# Altium PCB Shield_Due.PcbDoc (part 1 of 2)
Units mil, origin at the board's own origin, x right, y up, seen from the top; angles counter-clockwise.
Board outline 10516 x 7552 mil, 4 copper layers (Top Layer, Layer 1 (GND), Layer 2 (PWR), Bottom Layer), stack 71.556 mil thick; 97 components, 77 nets, 424 pads, 5 vias.
Unrouted connection lines stored in the file: 174.
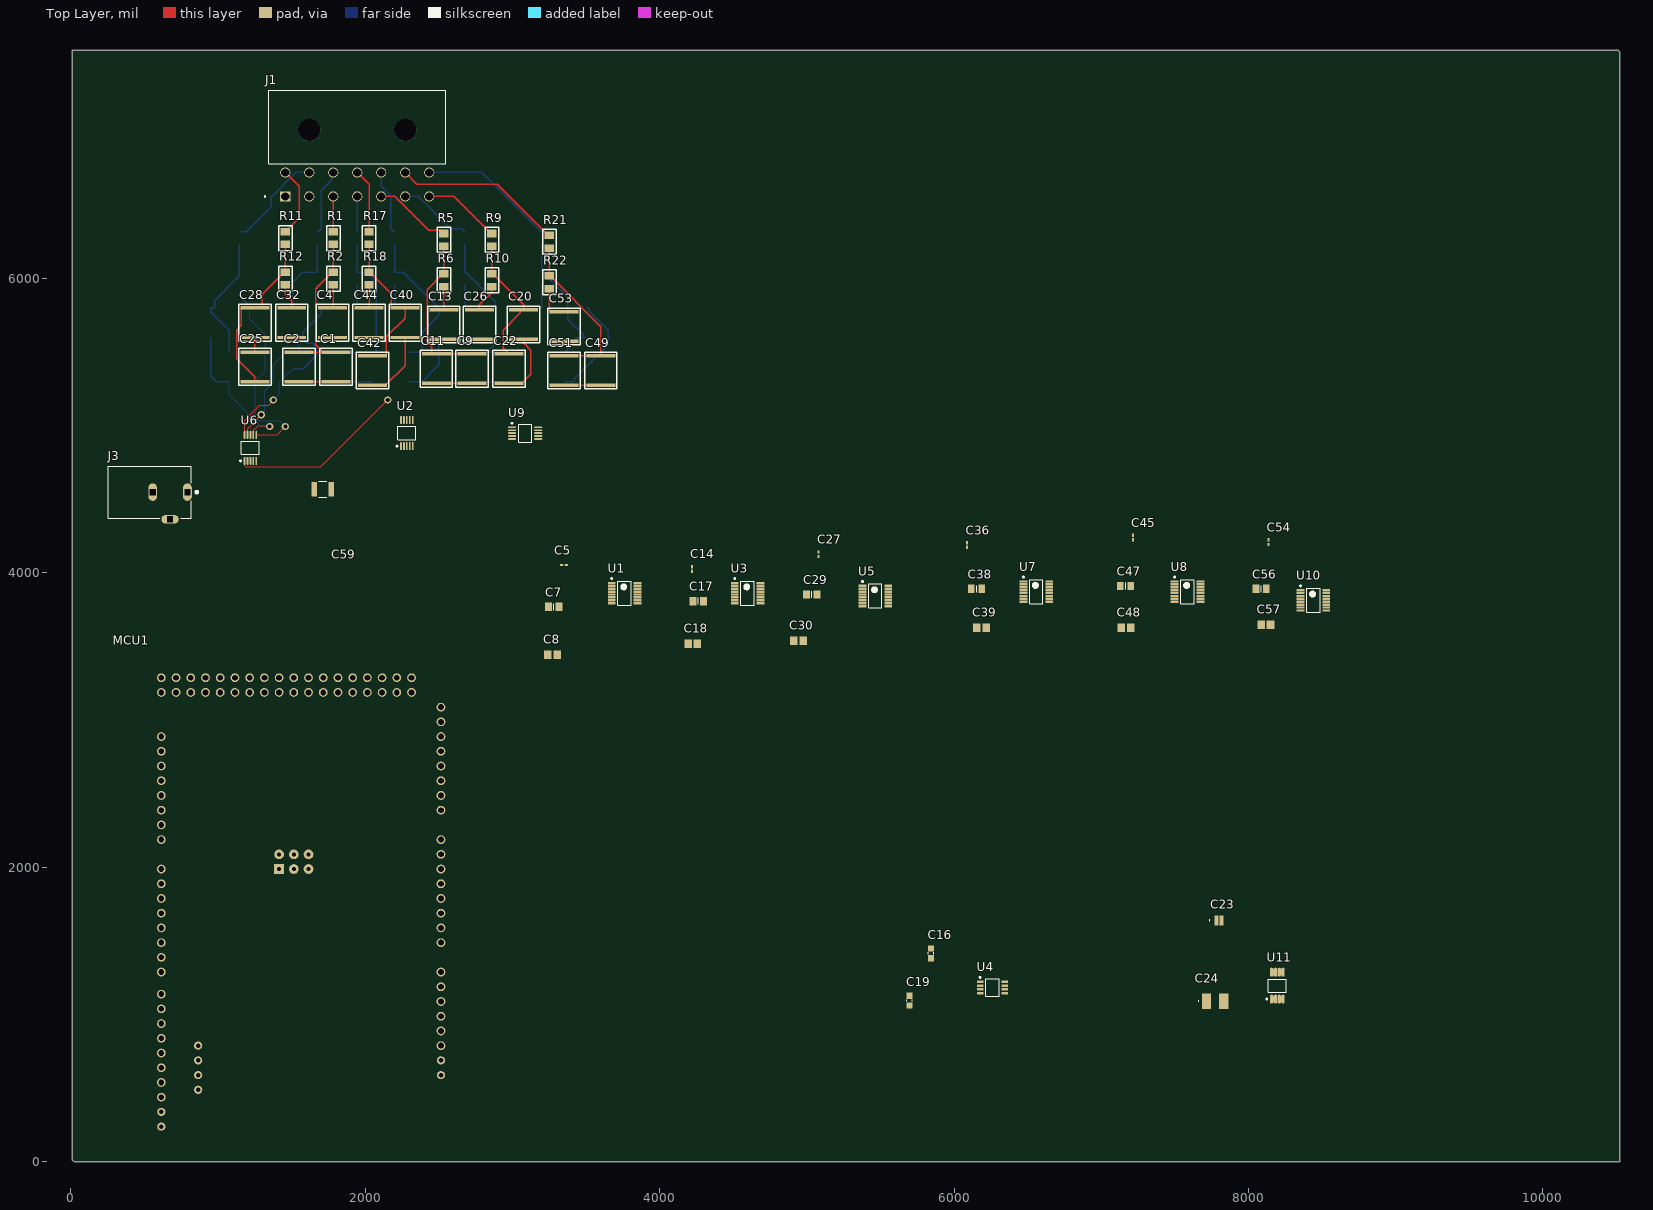
[diagram p0: Top Layer view]
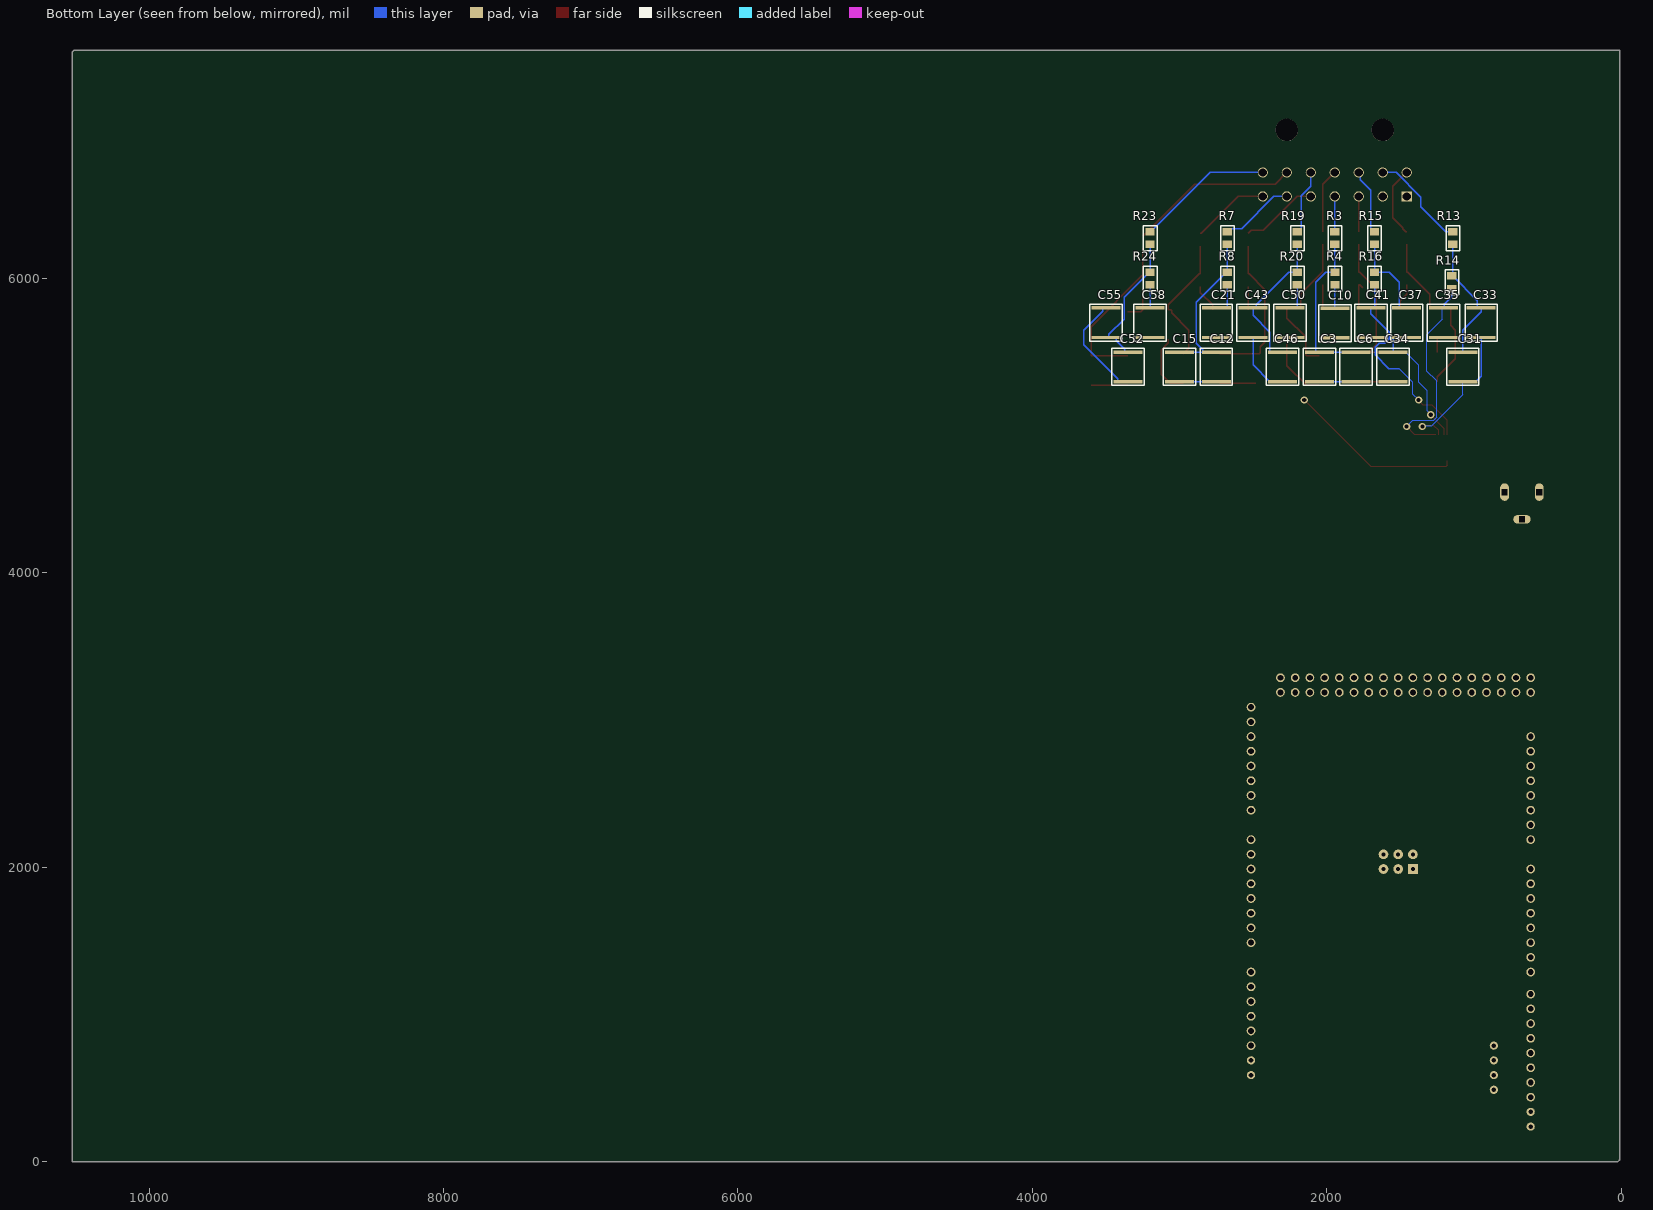
[diagram p1: Bottom Layer view, seen from below]
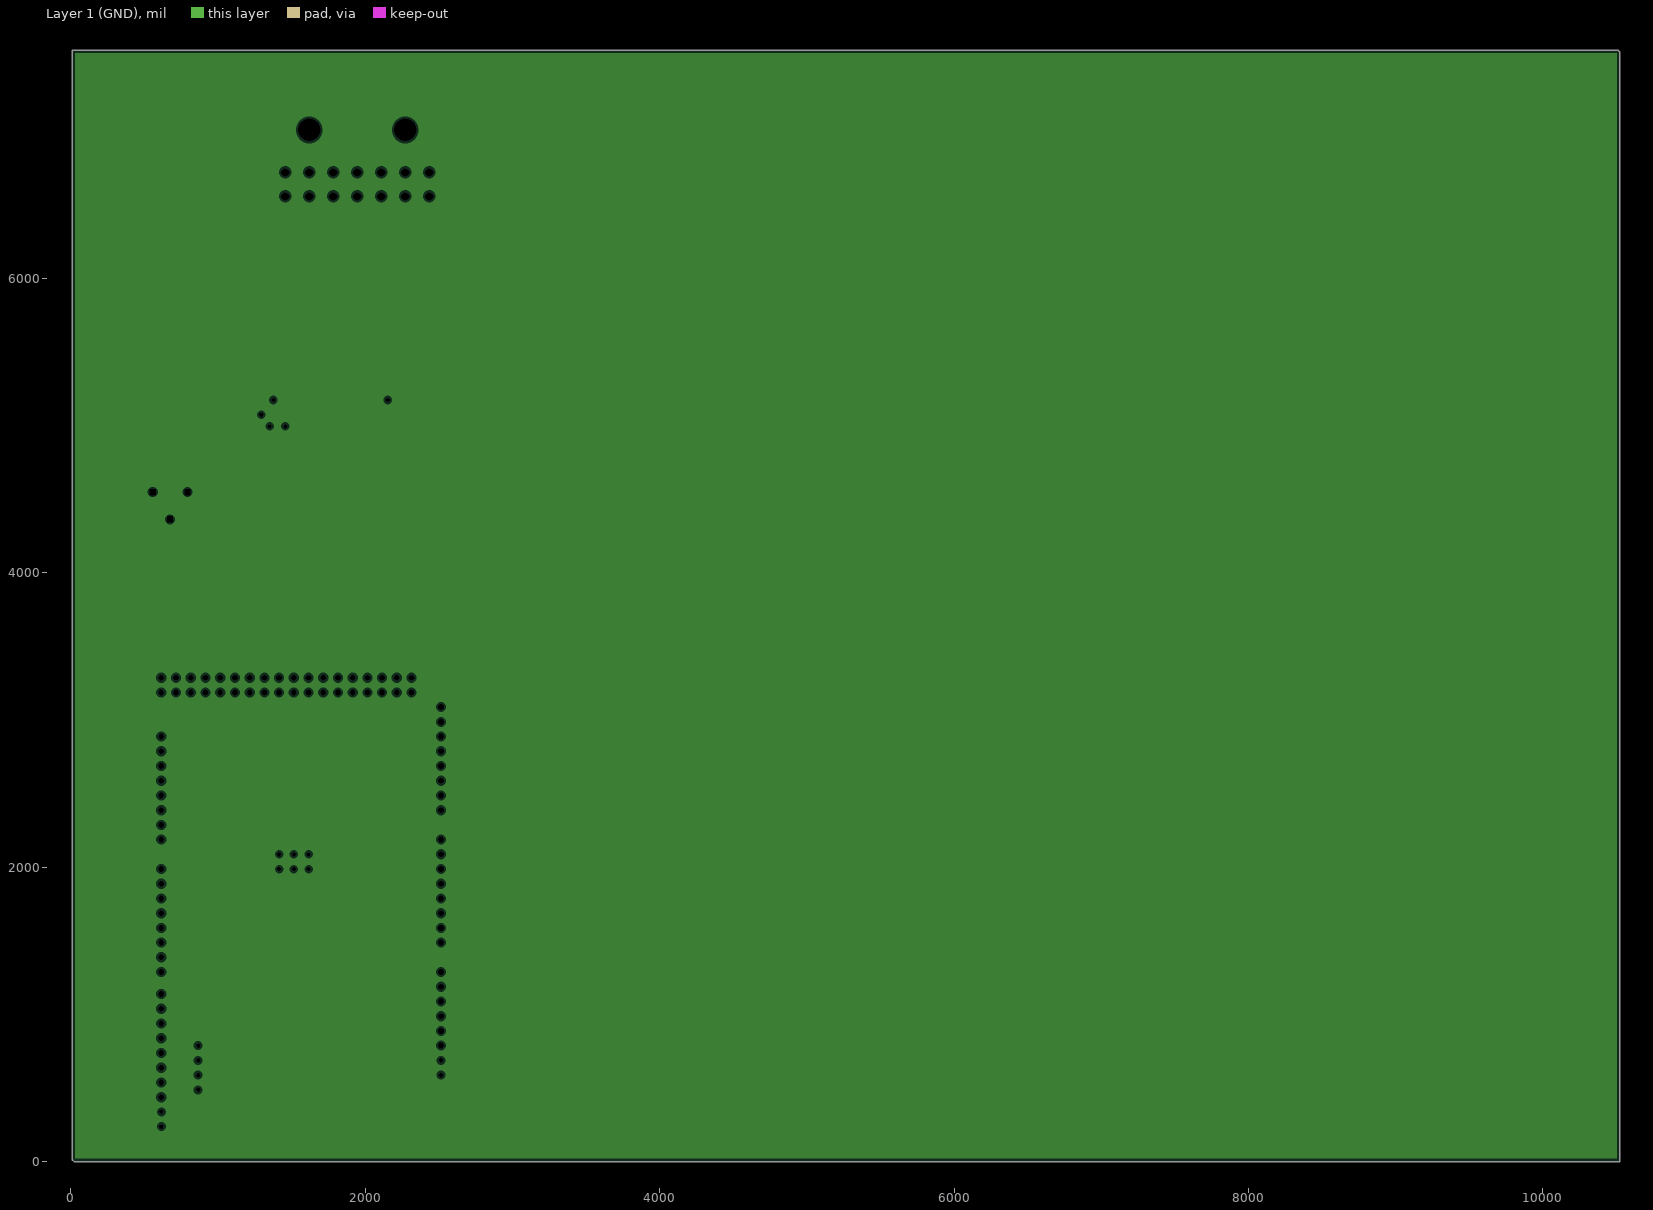
[diagram p2: Layer 1 (GND), clearances drawn from the general rule]
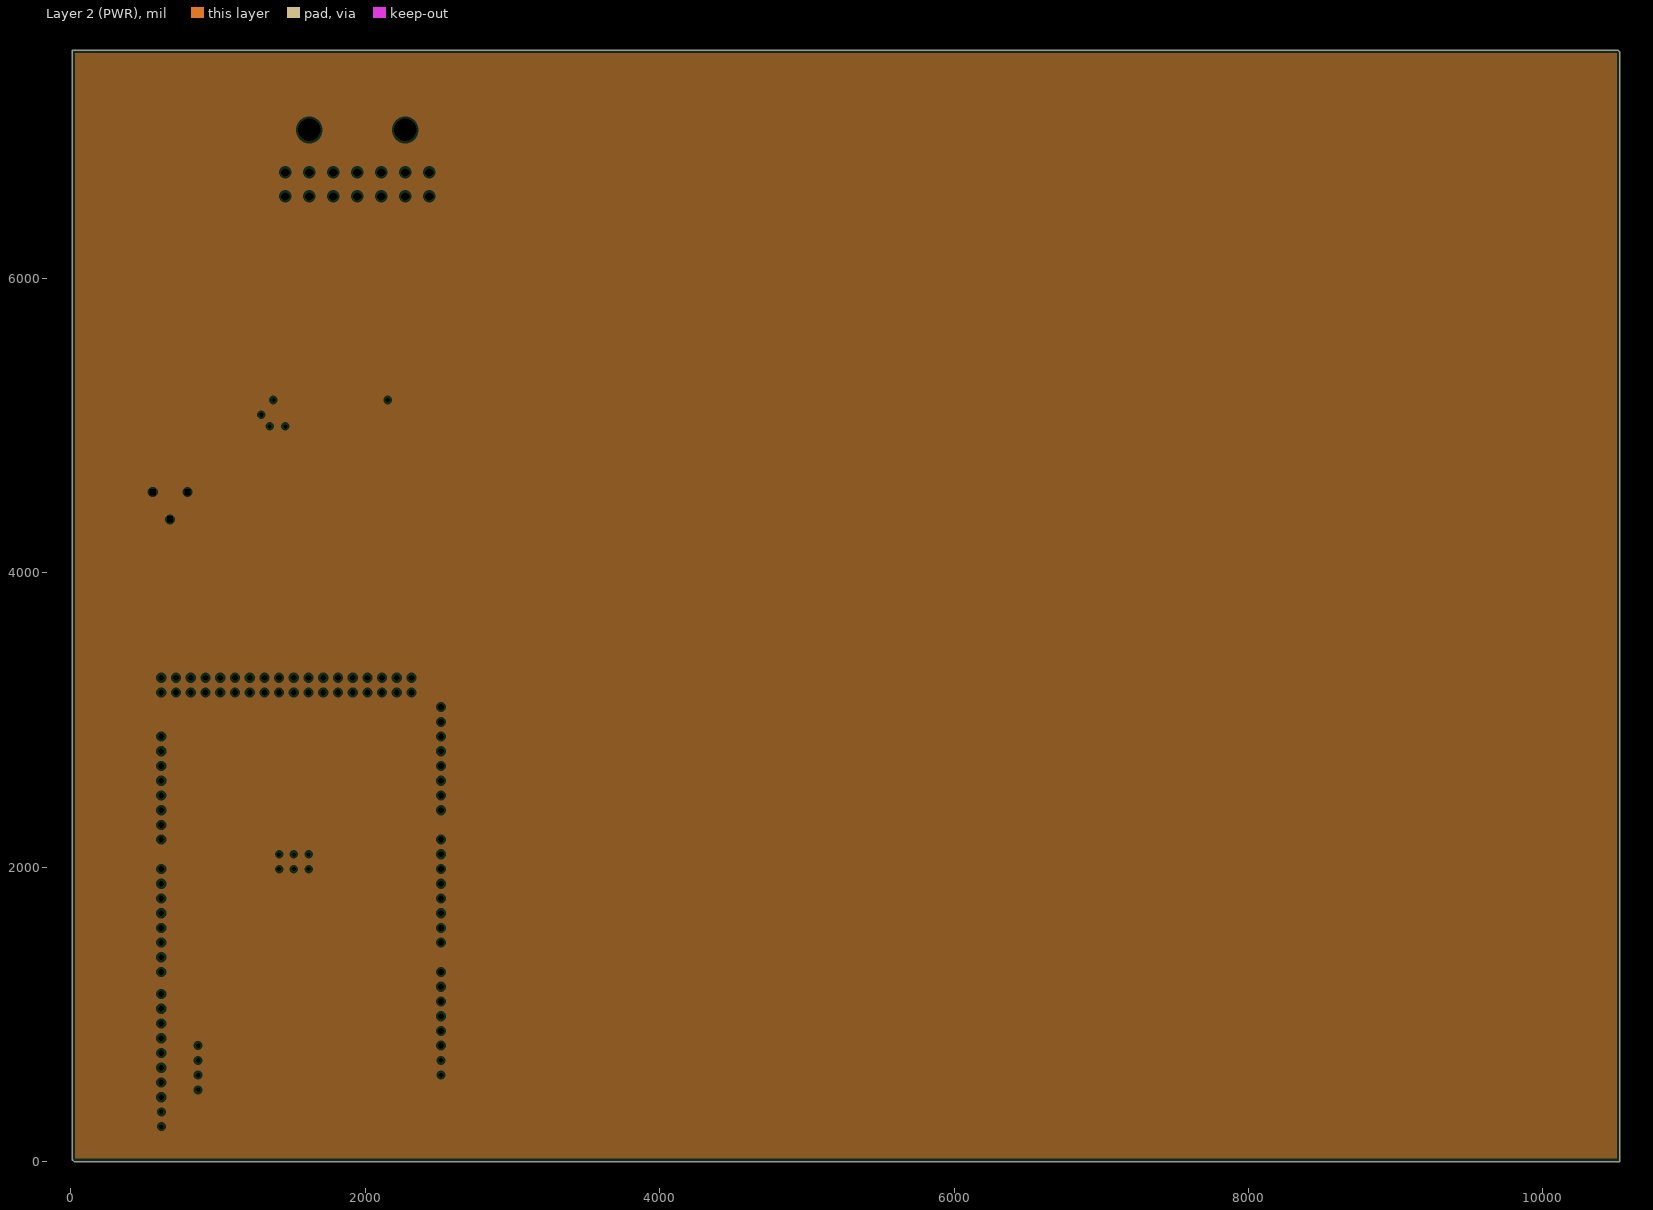
[diagram p3: Layer 2 (PWR), clearances drawn from the general rule]

## Layer stack, top to bottom
Top Solder: solder mask 0.5, Solder Resist, Dk 3.3
Top Layer: signal copper 0.7
Dielectric 1: prepreg 8.7, PP-006, Dk 4.1
Layer 1 (GND): plane copper 1.378
Dielectric1: core 50, FR-4, Dk 4.3
Layer 2 (PWR): plane copper 1.378
Dielectric 2: prepreg 8.7, PP-006, Dk 4.1
Bottom Layer: signal copper 0.7
Bottom Solder: solder mask 0.5, Solder Resist, Dk 3.3

## Board outline
10524,0 10524,7539 10511,7552 8,7552 8,13 21,0 8,13 21,0

## Design rules (kind name [scope] priority, off if disabled: settings)
Clearance [All] p1: gap=10 ignorepadtopadclearanceinfootprint=TRUE
DiffPairsRouting [All] p1: maxlimit=10 minlimit=10 mostfreqgap=10 toplayer_minwidth=10 toplayer_maxwidth=10 toplayer_prefwidth=10 bottomlayer_minwidth=10 bottomlayer_maxwidth=10 bottomlayer_prefwidth=10 maxuncoupledlength=500
HoleSize [All] p1: absolutevalues=TRUE maxlimit=300 minlimit=10 maxpercent=80.000 minpercent=20.000
MinimumAnnularRing [All] p1: minimumring=10
PasteMaskExpansion [All] p1: expansion=10
PlaneClearance [All] p1: clearance=15
PlaneConnect [All] p1: pad.planeconnectstyle=Relief pad.reliefexpansion=20 pad.reliefentries=4 pad.reliefconductorwidth=10 pad.reliefairgap=10 via.planeconnectstyle=Direct via.reliefexpansion=20 via.reliefentries=4 via.reliefconductorwidth=10 via.reliefairgap=10
PolygonConnect [All] p1: thpad.connectstyle=Relief thpad.reliefconductorwidth=10 thpad.reliefentries=4 thpad.polygonreliefangle="90 Angle" thpad.airgapwidth=10 smdpad.connectstyle=Relief smdpad.reliefconductorwidth=10 smdpad.reliefentries=4 smdpad.polygonreliefangle="90 Angle" smdpad.airgapwidth=10 via.connectstyle=Direct via.reliefconductorwidth=10 via.reliefentries=4 via.polygonreliefangle="90 Angle" via.airgapwidth=10
RoutingVias [All] p1: holewidth=10 width=20 viastyle="Through Hole" minholewidth=10 minwidth=20 maxholewidth=10 maxwidth=20
SMDNeckDown [All] p1: percent=100.000
SilkToSolderMaskClearance SilkscreenOverComponentPads [IsPad] p1: minsilkscreentomaskgap=10 clearancetoexposedcopper=TRUE
SolderMaskExpansion [All] p1: expansion=10 istentingtop=FALSE
Width [All] p1: maxlimit=10 minlimit=6 preferedwidth=10 minimp=50.000000 maximp=50.000000 favimp=50.000000
24 further rules are at their usual default settings.

## Components (designator, comment, footprint, x,y, rotation, side; value= is the part's Value field where it differs from the comment)
C1 "CAP CER 0.47UF 50V C0G/NP0 2220" "2220 (5650) Capacitor" 1800,5400 r90 top
C2 "CAP CER 0.47UF 50V C0G/NP0 2220" "2220 (5650) Capacitor" 1550,5400 r90 top
C3 "CAP CER 0.47UF 50V C0G/NP0 2220" "2220 (5650) Capacitor" 2050,5400 r90 bottom
C4 "CAP CER 0.47UF 50V C0G/NP0 2220" "2220 (5650) Capacitor" 1776.09,5700 r270 top
C5 "CL03A225MQ3CRNC" CAP_CL_03_SAM 3349,4055 r0 top
C6 "CAP CER 0.47UF 50V C0G/NP0 2220" "2220 (5650) Capacitor" 1800,5400 r90 bottom
C7 "CL21A476MQCLRNC" CAPC2012X140N 3280.43,3769 r0 top
C8 "C0805C275K8PACTU" CAPC220145_105N_KEM 3271,3444 r0 top
C9 "CAP CER 0.47UF 50V C0G/NP0 2220" "2220 (5650) Capacitor" 2725,5387.99 r270 top
C10 "CAP CER 0.47UF 50V C0G/NP0 2220" "2220 (5650) Capacitor" 1943,5696.69 r270 bottom
C11 "CAP CER 0.47UF 50V C0G/NP0 2220" "2220 (5650) Capacitor" 2481.99,5387.99 r270 top
C12 "CAP CER 0.47UF 50V C0G/NP0 2220" "2220 (5650) Capacitor" 2750,5400 r270 bottom
C13 "CAP CER 0.47UF 50V C0G/NP0 2220" "2220 (5650) Capacitor" 2532.98,5687.99 r270 top
C14 "CL03A225MQ3CRNC" CAP_CL_03_SAM 4220,4026.5 r90 top
C15 "CAP CER 0.47UF 50V C0G/NP0 2220" "2220 (5650) Capacitor" 3000,5400 r270 bottom
C16 "TACL106K010RTA" CAPC1608X90 5843,1415 r90 top
C17 "CL21A476MQCLRNC" CAPC2012X140N 4261.93,3808.37 r0 top
C18 "C0805C275K8PACTU" CAPC220145_105N_KEM 4224.64,3518 r0 top
C19 "TACL106K010RTA" CAPC1608X90 5697,1094.46 r90 top
C20 "CAP CER 0.47UF 50V C0G/NP0 2220" "2220 (5650) Capacitor" 3075,5687.99 r270 top
C21 "CAP CER 0.47UF 50V C0G/NP0 2220" "2220 (5650) Capacitor" 2750,5700 r270 bottom
C22 "CAP CER 0.47UF 50V C0G/NP0 2220" "2220 (5650) Capacitor" 2975,5387.99 r270 top
C23 "AWK107BJ106MV-T" AWK107_0306_TAY 7800.22,1639 r0 top
C24 "25TQC5R6M" POSCAP_B1_B1S_B1G_B15G_B2_B2S 7774,1090 r0 top
C25 "CAP CER 0.47UF 50V C0G/NP0 2220" "2220 (5650) Capacitor" 1250,5400 r90 top
C26 "CAP CER 0.47UF 50V C0G/NP0 2220" "2220 (5650) Capacitor" 2775,5687.99 r270 top
C27 "CL03A225MQ3CRNC" CAP_CL_03_SAM 5080,4127 r90 top
C28 "CAP CER 0.47UF 50V C0G/NP0 2220" "2220 (5650) Capacitor" 1250,5700 r270 top
C29 "CL21A476MQCLRNC" CAPC2012X140N 5033.57,3853.31 r0 top
C30 "C0805C275K8PACTU" CAPC220145_105N_KEM 4943,3539 r0 top
C31 "CAP CER 0.47UF 50V C0G/NP0 2220" "2220 (5650) Capacitor" 1075,5400 r270 bottom
C32 "CAP CER 0.47UF 50V C0G/NP0 2220" "2220 (5650) Capacitor" 1500,5700 r270 top
C33 "CAP CER 0.47UF 50V C0G/NP0 2220" "2220 (5650) Capacitor" 950,5700 r270 bottom
C34 "CAP CER 0.47UF 50V C0G/NP0 2220" "2220 (5650) Capacitor" 1550,5400 r90 bottom
C35 "CAP CER 0.47UF 50V C0G/NP0 2220" "2220 (5650) Capacitor" 1206.81,5700 r270 bottom
C36 "CL03A225MQ3CRNC" CAP_CL_03_SAM 6089,4189.5 r90 top
C37 "CAP CER 0.47UF 50V C0G/NP0 2220" "2220 (5650) Capacitor" 1456.01,5700 r270 bottom
C38 "CL21A476MQCLRNC" CAPC2012X140N 6153.43,3892 r0 top
C39 "C0805C275K8PACTU" CAPC220145_105N_KEM 6187,3627 r0 top
C40 "CAP CER 0.47UF 50V C0G/NP0 2220" "2220 (5650) Capacitor" 2270.97,5700 r270 top
C41 "CAP CER 0.47UF 50V C0G/NP0 2220" "2220 (5650) Capacitor" 1700,5700 r270 bottom
C42 "CAP CER 0.47UF 50V C0G/NP0 2220" "2220 (5650) Capacitor" 2050,5375 r270 top
C43 "CAP CER 0.47UF 50V C0G/NP0 2220" "2220 (5650) Capacitor" 2500,5700 r270 bottom
C44 "CAP CER 0.47UF 50V C0G/NP0 2220" "2220 (5650) Capacitor" 2025,5700 r270 top
C45 "CL03A225MQ3CRNC" CAP_CL_03_SAM 7215,4240.5 r90 top
C46 "CAP CER 0.47UF 50V C0G/NP0 2220" "2220 (5650) Capacitor" 2300,5400 r270 bottom
C47 "CL21A476MQCLRNC" CAPC2012X140N 7166,3911 r0 top
C48 "C0805C275K8PACTU" CAPC220145_105N_KEM 7168.08,3627 r0 top
C49 "CAP CER 0.47UF 50V C0G/NP0 2220" "2220 (5650) Capacitor" 3600,5375 r270 top
C50 "CAP CER 0.47UF 50V C0G/NP0 2220" "2220 (5650) Capacitor" 2250,5700 r270 bottom
C51 "CAP CER 0.47UF 50V C0G/NP0 2220" "2220 (5650) Capacitor" 3350,5375 r270 top
C52 "CAP CER 0.47UF 50V C0G/NP0 2220" "2220 (5650) Capacitor" 3350,5400 r90 bottom
C53 "CAP CER 0.47UF 50V C0G/NP0 2220" "2220 (5650) Capacitor" 3350,5675 r270 top
C54 "CL03A225MQ3CRNC" CAP_CL_03_SAM 8136,4209.5 r90 top
C55 "CAP CER 0.47UF 50V C0G/NP0 2220" "2220 (5650) Capacitor" 3500,5700 r270 bottom
C56 "CL21A476MQCLRNC" CAPC2012X140N 8087,3892 r0 top
C57 "C0805C275K8PACTU" CAPC220145_105N_KEM 8118.61,3647 r0 top
C58 "CAP CER 0.47UF 50V C0G/NP0 2220" "2220 (5650) Capacitor" 3200,5700 r270 bottom
C59 "CL32A106KAULNNE" CAP_CL32_SAM 1710.18,4567 r0 top
J1 "Connector Header, 14-Position, 2 Rows, Male Pin" TE_1-770973-0 1456.01,6558.03 r180 top
J3 "PJ-102AH" CUI_PJ-102AH 535.31,4549 r180 top
MCU1 "DUE(NORMAL)" DUE(NORMAL) 1814,2438 r90 top
R1 "RES SMD 5.1K OHM 1% 0.4W 0805" "0805 Resistor" 1781.99,6275 r270 top
R2 "RES SMD 5.1K OHM 1% 0.4W 0805" "0805 Resistor" 1781.99,6000 r270 top
R3 "RES SMD 5.1K OHM 1% 0.4W 0805" "0805 Resistor" 1945,6275 r270 bottom
R4 "RES SMD 5.1K OHM 1% 0.4W 0805" "0805 Resistor" 1944,6000 r270 bottom
R5 "RES SMD 5.1K OHM 1% 0.4W 0805" "0805 Resistor" 2532.98,6262.99 r270 top
R6 "RES SMD 5.1K OHM 1% 0.4W 0805" "0805 Resistor" 2532.98,5987.99 r270 top
R7 "RES SMD 5.1K OHM 1% 0.4W 0805" "0805 Resistor" 2675,6275 r270 bottom
R8 "RES SMD 5.1K OHM 1% 0.4W 0805" "0805 Resistor" 2675,6000 r270 bottom
R9 "RES SMD 5.1K OHM 1% 0.4W 0805" "0805 Resistor" 2858.96,6262.99 r270 top
R10 "RES SMD 5.1K OHM 1% 0.4W 0805" "0805 Resistor" 2858.96,5987.99 r270 top
R11 "RES SMD 5.1K OHM 1% 0.4W 0805" "0805 Resistor" 1456.01,6275 r270 top
R12 "RES SMD 5.1K OHM 1% 0.4W 0805" "0805 Resistor" 1456.01,6000 r270 top
R13 "RES SMD 5.1K OHM 1% 0.4W 0805" "0805 Resistor" 1144,6275 r270 bottom
R14 "RES SMD 5.1K OHM 1% 0.4W 0805" "0805 Resistor" 1150,5975 r270 bottom
R15 "RES SMD 5.1K OHM 1% 0.4W 0805" "0805 Resistor" 1675,6275 r270 bottom
R16 "RES SMD 5.1K OHM 1% 0.4W 0805" "0805 Resistor" 1675,6000 r270 bottom
R17 "RES SMD 5.1K OHM 1% 0.4W 0805" "0805 Resistor" 2025,6275 r270 top
R18 "RES SMD 5.1K OHM 1% 0.4W 0805" "0805 Resistor" 2025,6000 r270 top
R19 "RES SMD 5.1K OHM 1% 0.4W 0805" "0805 Resistor" 2200,6275 r270 bottom
R20 "RES SMD 5.1K OHM 1% 0.4W 0805" "0805 Resistor" 2200,6000 r270 bottom
R21 "RES SMD 5.1K OHM 1% 0.4W 0805" "0805 Resistor" 3250,6250 r270 top
R22 "RES SMD 5.1K OHM 1% 0.4W 0805" "0805 Resistor" 3250,5975 r270 top
R23 "RES SMD 5.1K OHM 1% 0.4W 0805" "0805 Resistor" 3200,6275 r270 bottom
R24 "RES SMD 5.1K OHM 1% 0.4W 0805" "0805 Resistor" 3200,6000 r270 bottom
U1 "LTC2336HMS-18" TSSOP50P490X110-16N 3761.6,3863.16 r0 top
U2 "AD8244BRMZ" AD8244BRMZ 2282.19,4950 r90 top
U3 "LTC2336HMS-18" TSSOP50P490X110-16N 4597.41,3863.16 r0 top
U4 "tl7660CDGKR" DGK0008A_L 6261,1183 r0 top
U5 "LTC2336HMS-18" TSSOP50P490X110-16N 5465.29,3843.47 r0 top
U6 "AD8244BRMZ" AD8244BRMZ 1219.09,4850 r90 top
U7 "LTC2336HMS-18" TSSOP50P490X110-16N 6559,3873 r0 top
U8 "LTC2336HMS-18" TSSOP50P490X110-16N 7586.6,3873 r0 top
U9 "AD8244BRMZ" AD8244BRMZ 3086.22,4950 r0 top
U10 "LTC2336HMS-18" TSSOP50P490X110-16N 8442.1,3813.94 r0 top
U11 "LTC6655CHMS8-1.25#PBF" TSOP65P490X110-8N 8196.8,1195.46 r90 top

## Footprints (in the part's own frame and the unit in brackets; to place one, negate y for a bottom-side part, rotate by r counter-clockwise, add the part's x,y. Pads: shape width x height; smd on the part's side, far side on the other; paste and mask are expansions set on the pad)
"0805 Resistor" [mm]
  rect 1.3x1.6 smd: 1(-1.1,0) 2(1.1,0)
  silkscreen extent -2.16,-1.14 2.16,1.2
"2220 (5650) Capacitor" [mm]
  rect 0.6x5 smd: 1(-2.55,0) 2(2.55,0)
  silkscreen extent -3.17,-2.79 3.17,2.79
AD8244BRMZ [mm] "Op Amp Quad Low Power Amplifier R-R O/P ±18V/36V 10-Pin MSOP Tube"
  oval 1.4x0.3 smd: 1(-2.25,1) 2(-2.25,0.5) 3(-2.25,0) 4(-2.25,-0.5) 5(-2.25,-1) 6(2.25,-1) 7(2.25,-0.5) 8(2.25,0) 9(2.25,0.5) 10(2.25,1)
  silkscreen extent -2.37,-1.55 1.15,1.82, body extent -1.55,-1.55 1.55,1.55, height 1.1
AWK107_0306_TAY [mil]
  rect 29x66.93 smd paste+0 mask+0: 1(-17.22,0) 2(17.22,0)
  silkscreen extent -68,-3 -62,3, body extent -18,-33 18,33, height 22
CAP_CL32_SAM [mm]
  rect 0.956x2.5 smd paste+0 mask+0: 1(-1.478,0) 2(1.478,0)
  silkscreen extent -0.69,-1.38 0.69,1.38, body extent -1.6,-1.25 1.6,1.25, height 1
CAP_CL_03_SAM [mil]
  rect 22x13 smd paste+0 mask+0: 1(-15.5,0) 2(15.5,0)
  body extent -13,-6 13,6, height 13
CAPC1608X90 [mm]
  rect 1.1x1 smd: +(-0.85,0) -(0.85,0)
  silkscreen extent -0.15,-0.45 0.15,0.45
CAPC2012X140N [mm]
  rect 1.15x1.45 smd: 1(-0.9,0) 2(0.9,0)
  silkscreen extent 0,-0.55 0,0.55
CAPC220145_105N_KEM [mm]
  rect 1.306x1.45 smd paste+0 mask+0: 1(-0.803,0) 2(0.803,0)
  body extent -1.1,-0.72 1.1,0.72, height 1.05
CUI_PJ-102AH [mm]
  oval 1.508x3.016 hole 1 square: 1(-6.5,0) 2(-0.5,0)
  oval 3.016x1.508 hole 1 square: 3(-3.5,4.7)
  silkscreen extent -8.3,-4.5 7.2,4.5
DGK0008A_L [mm] "TSOP, 8-Leads, Body 3.1x3.1mm, Pitch 0.65mm, IPC High Density"
  rrect22% 1.15x0.45 smd: 1(-2.125,0.975) 2(-2.125,0.325) 3(-2.125,-0.325) 4(-2.125,-0.975) 5(2.125,-0.975) 6(2.125,-0.325) 7(2.125,0.325) 8(2.125,0.975)
  silkscreen extent -2.25,-1.55 1.15,1.87, body extent -2.45,-1.5 2.45,1.5, height 0.94
DUE(NORMAL) [mm]
  round 1.508 hole 1: 2(-16.51,30.48) 3(-19.05,30.48) 3V3(-39.37,-17.78) 4(-21.59,30.48) 5(-24.13,30.48) 5V(-36.83,-17.78) 5V_A(19.05,30.48) 5V_B(21.59,30.48) 6(-26.67,30.48) 7(-29.21,30.48) 8(-33.02,30.48) 9(-35.56,30.48) 10(-38.1,30.48) 11(-40.64,30.48) 12(-43.18,30.48) 13(-45.72,30.48) 22(19.05,27.94) 23(21.59,27.94) 24(19.05,25.4) 25(21.59,25.4) 26(19.05,22.86) 27(21.59,22.86) 28(19.05,20.32) 29(21.59,20.32) 30(19.05,17.78) 31(21.59,17.78) 32(19.05,15.24) 33(21.59,15.24) 34(19.05,12.7) 35(21.59,12.7) 36(19.05,10.16) 37(21.59,10.16) 38(19.05,7.62) 39(21.59,7.62) 40(19.05,5.08) 41(21.59,5.08) 42(19.05,2.54) 43(21.59,2.54) 44(19.05,0) 45(21.59,0) 46(19.05,-2.54) 47(21.59,-2.54) 48(19.05,-5.08) 49(21.59,-5.08) 50(19.05,-7.62) 51(21.59,-7.62) 52(19.05,-10.16) 53(21.59,-10.16) A0(-24.13,-17.78) A1(-21.59,-17.78) A2(-19.05,-17.78) A3(-16.51,-17.78) A4(-13.97,-17.78) A5(-11.43,-17.78) A6(-8.89,-17.78) A7(-6.35,-17.78) A8(-1.27,-17.78) A9(1.27,-17.78) A10(3.81,-17.78) A11(6.35,-17.78) AREF(-50.8,30.48) AREF1(-50.8,30.48) CANRX(13.97,-17.78) CANTX(16.51,-17.78) DAC0(8.89,-17.78) DAC1(11.43,-17.78) GND1(-48.26,30.48) GND_1(-34.29,-17.78) GND_2(-31.75,-17.78) GND_A(19.05,-12.7) GND_B(21.59,-12.7) RESET(-41.91,-17.78) RX0(-11.43,30.48) RX1(6.35,30.48) RX2(1.27,30.48) RX3(-3.81,30.48) SCL(11.43,30.48) SDA(8.89,30.48) TX0(-13.97,30.48) TX1(3.81,30.48) TX2(-1.27,30.48) TX3(-6.35,30.48) VIN(-29.21,-17.78)
  round 1.676 hole 0.7: 5V_ICSP(-8.89,5.08) GND_ICSP(-8.89,10.16) MOSI_ICSP(-8.89,7.62) RESET_ICSP(-11.43,5.08) SCK_ICSP(-11.43,7.62)
  round 1.422 hole 0.8: GND_DEBUG(-41.91,24.13) IOREF(-44.45,-17.78) NC(-46.99,-17.78) RESET_DEBUG(-49.53,24.13) SCL1(-55.88,30.48) SDA1(-53.34,30.48) SWCLK_DEBUG(-44.45,24.13) SWDIO_DEBUG(-46.99,24.13)
  rect 1.676x1.676 / inner round 1.549 / far side rect 1.676x1.676 hole 0.7: MISO_ICSP(-11.43,10.16)
POSCAP_B1_B1S_B1G_B15G_B2_B2S [mm]
  rect 1.6x2.7 smd: 1(-1.5,0) 2(1.5,0)
  silkscreen extent -2.9,-0.05 -2.8,0.05, body extent -1.75,-1.4 1.75,1.4, height 1.88
TE_1-770973-0 [mm]
  rect 1.75x1.75 hole 1.4: 1(0,0)
  round 1.75 hole 1.4: 2(-4.14,0) 3(-8.28,0) 4(-12.42,0) 5(-16.56,0) 6(-20.7,0) 7(-24.84,0) 8(0,-4.14) 9(-4.14,-4.14) 10(-8.28,-4.14) 11(-12.42,-4.14) 12(-16.56,-4.14) 13(-20.7,-4.14) 14(-24.84,-4.14)
  round 3.86 hole 3.86 unplated: ""(-20.7,-11.48) ""(-4.14,-11.48)
  silkscreen extent -27.7,-18.34 3.61,0.1
TSOP65P490X110-8N [mm] "TSOP, 8-Leads, Body 3.00x3.00mm, Pitch 0.65mm, IPC Medium Density"
  oval 1.55x0.6 smd: 1(-2.325,0.975) 2(-2.325,0.325) 3(-2.325,-0.325) 4(-2.325,-0.975) 5(2.325,-0.975) 6(2.325,-0.325) 7(2.325,0.325) 8(2.325,0.975)
  silkscreen extent -2.45,-1.55 1.15,1.95, body extent -1.55,-1.55 1.55,1.55, height 1.1
TSSOP50P490X110-16N [mm] "TSSOP, 16-Leads, Body 4.04x3.00mm, Pitch 0.50mm, IPC Medium Density"
  rect 1.35x0.4 smd: 1(-2.225,1.75) 2(-2.225,1.25) 3(-2.225,0.75) 4(-2.225,0.25) 5(-2.225,-0.25) 6(-2.225,-0.75) 7(-2.225,-1.25) 8(-2.225,-1.75) 9(2.225,-1.75) 10(2.225,-1.25) 11(2.225,-0.75) 12(2.225,-0.25) 13(2.225,0.25) 14(2.225,0.75) 15(2.225,1.25) 16(2.225,1.75)
  silkscreen extent -2.35,-2.08 1.15,2.62, body extent -1.55,-2.05 1.55,2.05, height 1.1

## Part data
C1 C2 C3 C4 C6 C9 C10 C11 C12 C13 C15 C20 C21 C22 C25 C26 C28 C31 C32 C33 C34 C35 C37 C40 C41 C42 C43 C44 C46 C49 C50 C51 C52 C53 C55 C58: "Cap Ceramic 0.47uF 50V C0G 5% SMD 2220 125°C Embossed Plastic T/R", Capacitance=470nF, Case/Package=2220, Dielectric Material=Ceramic, Manufacturer=KEMET, Manufacturer Part Number=C2220C474J5GACAUTO, Supplier Part Number 1=399-C2220C474J5GACAUTOCT-ND, Tolerance=5%, Voltage Rating (DC)=50V, Category="Ceramic Capacitors", ComponentLink1Description=http://www.farnell.com/datasheets/2747618.pdf?src-supplier=Farnell, ComponentLink1URL=http://www.farnell.com/datasheets/2747618.pdf?src-supplier=Farnell, Lead Free="Lead Free", Pricing 1="1=4.64000, 10=3.74400, 50=3.21940, 100=2.92000, 500=2.17128 (USD)", Pricing 2="1=4.64000, 10=3.74400, 50=3.21940, 100=2.92000, 500=2.17128 (USD)", Pricing 3="1=4.64000, 10=3.75000, 50=3.22000, 100=2.91000, 1000=2.48000, 10000=2.48000 (USD)", RoHS=Yes, RoHS Compliant=Yes, Stock 1=950, Stock 2=950, Stock 3=1000, Supplier 1=Digi-Key, Supplier 2=Digi-Key, Supplier 3=Mouser, Supplier Part Number 2=399-C2220C474J5GACAUTODKR-ND, Supplier Part Number 3=80-C2220C474J5GAUTO
C5 C14 C27 C36 C45 C54: "CL03 Series 0201 2.2 uF 6.3 V X5R ±20% Tolerance Multilayer Ceramic Capacitor", Capacitance=2.2uF, Case Code (Imperial)=0201, Case Code (Metric)=0603, Dielectric=X5R, Manufacturer=Samsung, Max Operating Temperature=85°C, Min Operating Temperature=-55°C, Supplier Part Number 1=1276-6870-1-ND, Tolerance=20%, Voltage Rating=6.3V, Case/Package=0201, Category="Ceramic Capacitors", ComponentLink1Description=https://datasheet.ciiva.com/26838/getdatasheetpartid-745303-26838096.pdf?src-supplier=Verical, ComponentLink1URL=https://datasheet.ciiva.com/26838/getdatasheetpartid-745303-26838096.pdf?src-supplier=Verical, Construction=Flat, Copyright="Copyright (C) 2022 Ultra Librarian. All rights reserved.", Depth=0.3mm, Digi-Key_Part_Number_1=1276-6870-2-ND, Digi-Key_Part_Number_2=1276-6870-1-ND, Digi-Key_Part_Number_3=1276-6870-6-ND, Height=0.3mm, Length=0.6mm, Manufacturer Part Number=CL03A225MQ3CRNC, Manufacturer_Part_Number=CL03A225MQ3CRNC, Mfr_Name=Samsung, Mount="Surface Mount", Packaging="Tape and Reel", Pricing 1="1=0.27000, 10=0.18500, 50=0.11080, 100=0.09360, 500=0.06406, 1000=0.05667, 2500=0.05421, 5000=0.04928 (USD)", Pricing 2="1=0.27000, 10=0.18500, 50=0.11080, 100=0.09360, 500=0.06406, 1000=0.05667, 2500=0.05421, 5000=0.04928 (USD)", Pricing 3="10000=0.04682, 20000=0.04435 (USD)", Pricing 4="1=0.29000, 10=0.13300, 50=0.13300, 100=0.10000, 1000=0.06100, 10000=0.04900 (USD)", Radiation Hardening=No, RefDes=RefDes, RoHS=Yes, RoHS Compliant=Yes, Series=CL, Stock 1=667406, Stock 2=667406, Stock 3=650000, Stock 4=295762, Supplier 1=Digi-Key, Supplier 2=Digi-Key, Supplier 3=Digi-Key, Supplier 4=Mouser, Supplier Part Number 2=1276-6870-6-ND, Supplier Part Number 3=1276-6870-2-ND, Supplier Part Number 4=187-CL03A225MQ3CRNC, Thickness=0.013inch, Type=DEV, Width=0.012inch
C7 C17 C29 C38 C47 C56: "Cap Ceramic 47uF 6.3V X5R 20% SMD 0805 85°C Paper T/R", Capacitance=47uF, Case Code (Imperial)=0805, Case Code (Metric)=2012, Dielectric=X5R, Manufacturer=Samsung, Max Operating Temperature=85°C, Min Operating Temperature=-55°C, Package="0805 Samsung", Package Quantity=4000, Supplier Part Number 1=1276-2420-1-ND, Tolerance=20%, Voltage Rating=6.3V, Availability=Unavailable, Case/Package=0805, Category="Ceramic Capacitors", ComponentLink1Description=https://datasheet.ciiva.com/25723/cl21a476mqclrnc-25723991.pdf?src-supplier=Digi-Key, ComponentLink1URL=https://datasheet.ciiva.com/25723/cl21a476mqclrnc-25723991.pdf?src-supplier=Digi-Key, Construction=Flat, Contact Plating=Tin, Depth=1.25mm, DigiKey-Purchase-URL=https://snapeda.com/shop?store=DigiKey&id=3598165, Lead Free="Lead Free", Length=2mm, Manufacturer Part Number=CL21A476MQCLRNC, MF=Samsung, Mount="Surface Mount", MP=CL21A476MQCLRNC, Packaging="Tape and Reel", Price=None, Pricing 1="1=0.49000, 10=0.34100, 50=0.23900, 100=0.20480, 500=0.15362, 1000=0.12973 (USD)", Pricing 2="1=0.49000, 10=0.34100, 50=0.23900, 100=0.20480, 500=0.15362, 1000=0.12973 (USD)", Pricing 3="4000=0.11607, 8000=0.10924 (USD)", Pricing 4="1=0.50000, 10=0.28500, 50=0.28500, 100=0.21700, 1000=0.13700, 10000=0.10800 (USD)", RoHS=Yes, RoHS Compliant=Yes, Series=CL, SnapEDA_Link=https://www.snapeda.com/parts/CL21A476MQCLRNC/Samsung/view-part/3598165/?ref=snap, Stock 1=98057, Stock 2=98057, Stock 3=98057, Stock 4=323, Supplier 1=Digi-Key, Supplier 2=Digi-Key, Supplier 3=Digi-Key, Supplier 4=Mouser, Supplier Part Number 2=1276-2420-6-ND, Supplier Part Number 3=1276-2420-2-ND, Supplier Part Number 4=187-CL21A476MQCLRNC, Termination=Wraparound, Thickness=0.037inch, Width=0.049inch
C8 C18 C30 C39 C48 C57: "0805 C 2.7uF Ceramic Multilayer Capacitor; 10 VDC; +85degC; X5R Dielec; +/-10%", Capacitance=2.7uF, Case Code (Imperial)=0805, Case Code (Metric)=2012, Dielectric=X5R, Dielectric Material=Ceramic, Manufacturer=KEMET, Max Operating Temperature=85°C, Mfr_Name=Kemet, Min Operating Temperature=-55°C, Package Quantity=1, Supplier Part Number 1=399-C0805C275K8PAC7800CT-ND, Tolerance=10%, Voltage=10V, Case/Package=0805, Category="Ceramic Capacitors", ComponentLink1Description=http://www.mouser.com/ds/2/212/KEM_C1006_X5R_SMD-1103249.pdf?src-supplier=Mouser, ComponentLink1URL=http://www.mouser.com/ds/2/212/KEM_C1006_X5R_SMD-1103249.pdf?src-supplier=Mouser, ComponentLink2Description=http://components.arrow.com/part/dataview/40912422S7467711N7429?src-supplier=Arrow+Electronics, ComponentLink2URL=http://components.arrow.com/part/dataview/40912422S7467711N7429?src-supplier=Arrow+Electronics, ComponentLink3Description=http://uk.rs-online.com/webdocs/13da/0900766b813da6d7.pdf?src-supplier=RSComponents, ComponentLink3URL=http://uk.rs-online.com/webdocs/13da/0900766b813da6d7.pdf?src-supplier=RSComponents, ComponentLink4Description=http://uk.rs-online.com/webdocs/13da/0900766b813da6d8.pdf?src-supplier=RSComponents, ComponentLink4URL=http://uk.rs-online.com/webdocs/13da/0900766b813da6d8.pdf?src-supplier=RSComponents, ComponentLink5Description=https://www.alliedelec.com/m/d/7f88201dbaab65c95b0b8234579261a3.pdf?src-supplier=Allied+Electronics, ComponentLink5URL=https://www.alliedelec.com/m/d/7f88201dbaab65c95b0b8234579261a3.pdf?src-supplier=Allied+Electronics, ComponentLink6Description=https://www.alliedelec.com/m/d/fc0aaf5de6140bfa85cbf42aaccfae41.pdf?src-supplier=Allied+Electronics, ComponentLink6URL=https://www.alliedelec.com/m/d/fc0aaf5de6140bfa85cbf42aaccfae41.pdf?src-supplier=Allied+Electronics, ComponentLink7Description=https://search.kemet.com/component-edge/download/datasheet/C0805C275K8PACTU.pdf?src-supplier=Digi-Key, ComponentLink7URL=https://search.kemet.com/component-edge/download/datasheet/C0805C275K8PACTU.pdf?src-supplier=Digi-Key, ComponentLink8Description=https://api.kemet.com/component-edge/download/datasheet/C0805C275K8PACTU.pdf?src-supplier=Digi-Key, ComponentLink8URL=https://api.kemet.com/component-edge/download/datasheet/C0805C275K8PACTU.pdf?src-supplier=Digi-Key, ComponentLink9Description=http://capacitoredge.kemet.com/capedge2/DataSheet?pn=C0805C275K8PAC7800&src-supplier=Avnet, ComponentLink9URL=http://capacitoredge.kemet.com/capedge2/DataSheet?pn=C0805C275K8PAC7800&src-supplier=Avnet, ComponentLink10Description=http://capacitoredge.kemet.com/capedge2/DataSheet?pn=C0805C275K8PAC7800&src-supplier=Avnet+Europe, ComponentLink10URL=http://capacitoredge.kemet.com/capedge2/DataSheet?pn=C0805C275K8PAC7800&src-supplier=Avnet+Europe, Construction=Flat, Copyright="Copyright (C) 2022 Ultra Librarian. All rights reserved.", Depth=1.25mm, Digi-Key_Part_Number_1=399-3127-1-ND, Digi-Key_Part_Number_2=399-3127-2-ND, Digi-Key_Part_Number_3=399-3127-6-ND, Dissipation Factor=5%, Height=3mm, Lead Free="Lead Free", Lead Pitch=0.75mm, Length=2mm, Manufacturer Part Number=C0805C275K8PACTU, Manufacturer_Part_Number=C0805C275K8PACTU, Mount="Surface Mount,PCB", Packaging="Tape and Reel", Pricing 1="1=0.51000, 10=0.36000, 50=0.27220, 100=0.23700, 500=0.17556, 1000=0.14923 (USD)", Pricing 2="1=0.51000, 10=0.36000, 50=0.27220, 100=0.23700, 500=0.17556, 1000=0.14923 (USD)", Pricing 3="4000=0.11970, 8000=0.11172 (USD)", Pricing 4="1=0.51000, 10=0.27300, 50=0.27300, 100=0.22400, 1000=0.14400, 10000=0.11100 (USD)", Radiation Hardening=No, REACH SVHC="No SVHC", RefDes=RefDes, RoHS=Yes, RoHS Compliant=Yes, Series=C, Stock 1=7603, Stock 2=7603, Stock 3=4000, Stock 4=6516, Supplier 1=Digi-Key, Supplier 2=Digi-Key, Supplier 3=Digi-Key, Supplier 4=Mouser, Supplier Part Number 2=399-C0805C275K8PAC7800DKR-ND, Supplier Part Number 3=399-C0805C275K8PAC7800TR-ND, Supplier Part Number 4=80-C0805C275K8P, Termination=SMD/SMT, Thickness=0.041inch, Type=DEV, Voltage Rating=10V, Voltage Rating (DC)=10V, Width=0.049inch
C16 C19: "Cap Tant Solid 10uF 10V L CASE 10% (1.6 X 0.85 X 0.85mm) SMD 1608-10 7.5 Ohm 125°C Plastic T/R", Capacitance=10uF, Case Code (Imperial)=0603, Case Code (Metric)=1608, Case/Package="Conformal Coated", Dielectric Material=Tantalum, ESR (Equivalent Series Resistance)=7.5R, Leakage Current=1uA, Manufacturer="Kyocera AVX", Max Operating Temperature=125°C, Min Operating Temperature=-55°C, Package=None, Package Quantity=3500, Supplier Part Number 1=478-TACL106K010RTACT-ND, Tolerance=10%, Voltage=10V, Availability=Unavailable, Category="Tantalum Capacitors", ComponentLink1Description=https://datasheet.ciiva.com/11219/tac-11219455.pdf?src-supplier=Avnet, ComponentLink1URL=https://datasheet.ciiva.com/11219/tac-11219455.pdf?src-supplier=Avnet, ComponentLink2Description=https://datasheet.ciiva.com/12907/tac-12907781.pdf?src-supplier=Mouser, ComponentLink2URL=https://datasheet.ciiva.com/12907/tac-12907781.pdf?src-supplier=Mouser, ComponentLink3Description=https://datasheet.ciiva.com/14598/70001310-14598278.pdf?src-supplier=Allied+Electronics, ComponentLink3URL=https://datasheet.ciiva.com/14598/70001310-14598278.pdf?src-supplier=Allied+Electronics, Construction=Flat, Depth=0.85mm, Dissipation Factor=20%, Height=0.85mm, Lead Pitch=0.55mm, Length=1.6mm, Manufacturer Part Number=TACL106K010RTA, MP=TACL106K010RTA, Number of Pins=2, Packaging="Tape and Reel", Polarity=Polar, Price=None, Pricing 1="1=2.54000, 10=2.05600, 50=1.79400, 100=1.56980, 500=1.19600, 1000=1.04650 (USD)", Pricing 2="1=2.54000, 10=2.05600, 50=1.79400, 100=1.56980, 500=1.19600, 1000=1.04650 (USD)", Pricing 3="3500=1.00913 (USD)", Radiation Hardening=No, RoHS=Yes, RoHS Compliant=Yes, Series=TAC, Stock 1=3500, Stock 2=3500, Stock 3=3500, Supplier 1=Digi-Key, Supplier 2=Digi-Key, Supplier 3=Digi-Key, Supplier Part Number 2=478-TACL106K010RTADKR-ND, Supplier Part Number 3=478-TACL106K010RTATR-ND, Termination=SMD/SMT, Voltage Rating=10V, Voltage Rating (DC)=10V, Width=0.85mm
C23: "Multilayer Ceramic Capacitor 10uF 4V 20% 0306 Emboss T/R", Capacitance=10uF, Case Code (Imperial)=0306, Case Code (Metric)=0816, Manufacturer="Taiyo Yuden", Max Operating Temperature=85°C, Min Operating Temperature=-55°C, Supplier Part Number 1=587-5159-1-ND, Tolerance=20%, Voltage Rating=4V, Case/Package=0306, Category="Ceramic Capacitors", ComponentLink1Description="https://ds.yuden.co.jp/TYCOMPAS/ut/detail?pn=AWK107BJ106MV-T &amp;u=M&src-supplier=Digi-Key", ComponentLink1URL="https://ds.yuden.co.jp/TYCOMPAS/ut/detail?pn=AWK107BJ106MV-T &amp;u=M&src-supplier=Digi-Key", ComponentLink2Description=http://ds.yuden.co.jp/TYCOMPAS/ut/detail.do?productNo=AWK107BJ106MV-T&amp;fileName=AWK107BJ106MV-T_SS&amp;mode=specSheetDownload&src-supplier=Digi-Key, ComponentLink2URL=http://ds.yuden.co.jp/TYCOMPAS/ut/detail.do?productNo=AWK107BJ106MV-T&amp;fileName=AWK107BJ106MV-T_SS&amp;mode=specSheetDownload&src-supplier=Digi-Key, Copyright="Copyright (C) 2022 Ultra Librarian. All rights reserved.", Digi-Key_Part_Number_1=587-5159-1-ND, Digi-Key_Part_Number_2=587-5159-2-ND, Digi-Key_Part_Number_3=587-5159-6-ND, Manufacturer Part Number=AWK107BJ106MV-T, Manufacturer_Part_Number=AWK107BJ106MV-T, Mfr_Name="Taiyo Yuden", Mount="Surface Mount", Packaging="Cut Tape", Pricing 1="1=0.53000, 10=0.37700, 50=0.28480, 100=0.24810, 500=0.18376, 1000=0.15620 (USD)", Pricing 2="1=0.53000, 10=0.37700, 50=0.28480, 100=0.24810, 500=0.18376, 1000=0.15620 (USD)", Pricing 3="4000=0.13783 (USD)", Pricing 4="1=0.51000, 10=0.27300, 50=0.27300, 100=0.23800, 1000=0.15000, 10000=0.13100 (USD)", RefDes=RefDes, RoHS=Yes, RoHS Compliant=Yes, Stock 1=5653, Stock 2=5653, Stock 3=4000, Stock 4=3076, Supplier 1=Digi-Key, Supplier 2=Digi-Key, Supplier 3=Digi-Key, Supplier 4=Mouser, Supplier Part Number 2=587-5159-6-ND, Supplier Part Number 3=587-5159-2-ND, Supplier Part Number 4=963-AWK107BJ106MV-T, Type=DEV
C24: "Cap Tant Solid 5.6uF 25V B2 CASE 20% (3.5 X 2.8 X 1.9mm) SMD 3528, B2 0.1 Ohm 105°C Embossed T/R", Capacitance=5.6uF, Case Code (Imperial)=1411, Case Code (Metric)=3528, ESR (Equivalent Series Resistance)=100mR, Leakage Current=42uA, Manufacturer=Panasonic, Max Operating Temperature=105°C, Min Operating Temperature=-55°C, Package Quantity=2000, Ripple Current=800mA, Supplier Part Number 1=P16518CT-ND, Tolerance=20%, Voltage=25V, Case/Package=1411, Category="Tantalum Capacitors", ComponentLink1Description=https://datasheet.ciiva.com/48675/aaa8000ce14-48675021.pdf?src-supplier=Avnet, ComponentLink1URL=https://datasheet.ciiva.com/48675/aaa8000ce14-48675021.pdf?src-supplier=Avnet, ComponentLink2Description=https://datasheet.ciiva.com/48543/tqc-series-eng-tds-48543112.pdf?src-supplier=Distrelec, ComponentLink2URL=https://datasheet.ciiva.com/48543/tqc-series-eng-tds-48543112.pdf?src-supplier=Distrelec, ComponentLink3Description=https://datasheet.ciiva.com/22745/1734368-22745228.pdf?src-supplier=Element14, ComponentLink3URL=https://datasheet.ciiva.com/22745/1734368-22745228.pdf?src-supplier=Element14, ComponentLink4Description=https://datasheet.ciiva.com/25785/1734368-25785141.pdf?src-supplier=Farnell, ComponentLink4URL=https://datasheet.ciiva.com/25785/1734368-25785141.pdf?src-supplier=Farnell, Datasheet Link=http://industrial.panasonic.com/cdbs/www-data/pdf/AAA8000/AAA8000C62.pdf, Depth=2.8mm, Dissipation Factor=10%, Features="General Purpose", Height=1.9mm, Height - Seated (Max)=0.079inch, Lead Free="Lead Free", Length=3.5mm, Life (Hours)=2000Hour, Manufacturer Part Number=25TQC5R6M, Manufacturer_Name=Panasonic, Manufacturer_Part_Number=25TQC5R6M, Mount="Surface Mount", Number of Pins=2, Packaging="Tape and Reel", Polarity=Polar, Pricing 1="1=2.01000, 10=1.58300, 50=1.37220, 100=1.18740, 500=0.89718, 1000=0.79162 (USD)", Pricing 2="1=2.01000, 10=1.58300, 50=1.37220, 100=1.18740, 500=0.89718, 1000=0.79162 (USD)", Pricing 3="2000=0.73885 (USD)", Pricing 4="1=1.77000, 10=1.27000, 50=1.27000, 100=1.08000, 1000=0.72000, 10000=0.67900 (USD)", Radiation Hardening=No, REACH SVHC="No SVHC", RoHS=Yes, RoHS Compliant=Yes, Stock 1=7710, Stock 2=7710, Stock 3=6000, Stock 4=2467, Supplier 1=Digi-Key, Supplier 2=Digi-Key, Supplier 3=Digi-Key, Supplier 4=Mouser, Supplier Part Number 2=P16518DKR-ND, Supplier Part Number 3=P16518TR-ND, Supplier Part Number 4=667-25TQC5R6M, Termination=SMD/SMT, Voltage Rating=25V, Voltage Rating (DC)=25V, Width=0.11inch
C59: "Cap Ceramic 10uF 25V X5R 10% SMD 1210 85°C Embossed T/R", Capacitance=10uF, Case Code (Imperial)=1210, Case Code (Metric)=3225, Dielectric=X5R, Manufacturer=Samsung, Max Operating Temperature=85°C, Min Operating Temperature=-55°C, Package Quantity=1, Supplier Part Number 1=1276-1854-1-ND, Tolerance=10%, Voltage Rating=25V, Case/Package=1210, Category="Ceramic Capacitors", ComponentLink1Description=https://datasheet.ciiva.com/25792/cl32a106kaulnne-25792896.pdf?src-supplier=Digi-Key, ComponentLink1URL=https://datasheet.ciiva.com/25792/cl32a106kaulnne-25792896.pdf?src-supplier=Digi-Key, ComponentLink2Description=https://datasheet.ciiva.com/16362/cl05b104kq5nnnc-16362286.pdf?src-supplier=Future+Electronics, ComponentLink2URL=https://datasheet.ciiva.com/16362/cl05b104kq5nnnc-16362286.pdf?src-supplier=Future+Electronics, Construction=Flat, Copyright="Copyright (C) 2022 Ultra Librarian. All rights reserved.", Depth=2.5mm, Digi-Key_Part_Number_1=1276-1854-2-ND, Digi-Key_Part_Number_2=1276-1854-1-ND, Digi-Key_Part_Number_3=1276-1854-6-ND, Height=1.8mm, Lead Free="Lead Free", Length=3.2mm, Manufacturer Part Number=CL32A106KAULNNE, Manufacturer_Part_Number=CL32A106KAULNNE, Mfr_Name=Samsung, Mount="Surface Mount", Packaging="Tape and Reel", Pricing 1="1=0.36000, 10=0.24500, 50=0.16360, 100=0.13910, 500=0.09816, 1000=0.08589 (USD)", Pricing 2="2000=0.08180, 4000=0.07566 (USD)", Pricing 3="1=0.38000, 10=0.26100, 50=0.26100, 100=0.14900, 500=0.10500, 1000=0.09200, 2000=0.08700, 4000=0.08000, 10000=0.07600 (USD)", Radiation Hardening=No, RefDes=RefDes, RoHS=Yes, RoHS Compliant=Yes, Series=CL, Stock 1=1126, Stock 2=2794000, Stock 3=13193, Supplier 1=Digi-Key, Supplier 2=Digi-Key, Supplier 3=Mouser, Supplier Part Number 2=1276-1854-2-ND, Supplier Part Number 3=187-CL32A106KAULNNE, Thickness=0.079inch, Type=DEV, Width=0.098inch
J1: library part 1-770973-0, "Connector Header, 14-Position, 2 Rows, Male Pin, PCB, White, Mate-N-Lok Series", Color=White, Contact Current Rating=9.5A, Flammability Rating="UL94 V-0", Insulation Resistance=100MR, Manufacturer="TE Connectivity", Max Operating Temperature=221°C, Max Voltage Rating (AC)=600V, Min Operating Temperature=-67°C, Number of Power Positions=14, Package=None, Package Quantity=200, Supplier Part Number 1=A32482-ND, Test Voltage=1.5kV, Approvals=CSA, Availability=Unavailable, Category="Power Connectors", Circuit Application=Power, ComponentLink1Description=https://datasheet.ciiva.com/19460/1963239-19460794.pdf?src-supplier=Jameco, ComponentLink1URL=https://datasheet.ciiva.com/19460/1963239-19460794.pdf?src-supplier=Jameco, ComponentLink2Description=https://datasheet.ciiva.com/1111/eng-cd-770973-g-1111842.pdf?src-supplier=Element14, ComponentLink2URL=https://datasheet.ciiva.com/1111/eng-cd-770973-g-1111842.pdf?src-supplier=Element14, ComponentLink3Description=https://datasheet.ciiva.com/710/eng-cd-770973-h-710742.pdf?src-supplier=Digi-Key, ComponentLink3URL=https://datasheet.ciiva.com/710/eng-cd-770973-h-710742.pdf?src-supplier=Digi-Key, ComponentLink4Description=https://datasheet.ciiva.com/16654/eng-cs-82181-softshell-high-density-0408-16654873.pdf?src-supplier=Avnet+Europe, ComponentLink4URL=https://datasheet.ciiva.com/16654/eng-cs-82181-softshell-high-density-0408-16654873.pdf?src-supplier=Avnet+Europe, Connector System=Wire-to-Board, Connector Type=Pin, Contact Gender=Male, Contact Material=Brass, Contact Plating=Tin, Contact Retention="No (Without)", Contact Type="Male Pin", Current Rating=9.5A, Fastening Type=Ramp, Height=11.86mm, Housing Color=White, Housing Material=Nylon, Length=30.56mm, Manufacturer Part Number=1-770973-0, Mating Alignment="Yes (With)", Mating Retention="Yes (With)", MF="{'manufacturer': 'TE Connectivity'}", Mount="Through Hole,Board", MP=1-770973-0, Number of Contacts=14, Number of Poles=14, Number of Ports=1, Number of Positions=14, Number of Rows=2, Number of Terminals/Pins=14, Orientation="Right Angle", Packaging=Bag, PCB Mount Alignment="No (Without)", PCB Mount Retention=With, PCB Thickness=1.57inch, Pitch=0.162inch, Plating Thickness=8.89um, Price=None, Pricing 1="1=6.69000, 10=6.05100, 100=5.29790, 500=4.46140, 1000=3.90372 (USD)", Pricing 2="1=6.19000, 10=5.42000, 25=5.24000, 50=5.07000, 100=4.89000, 250=4.38000 (USD)", Pricing 3="1=6.37000, 10=5.58000, 50=5.58000, 100=5.05000, 200=4.51000, 600=4.24000, 1000=3.71000, 2600=3.53000, 5000=3.45000, 10000=3.36000 (USD)", Radiation Hardening=No, REACH SVHC=Unknown, RoHS=Yes, RoHS Compliant=Yes, Row Spacing=0.163inch, Sealable="No (Without)", Series="Mini-Universal MATE-N-LOK", Stock 1=583, Stock 2=272, Stock 3=1677, Strain Relief="No (Without)", Supplier 1=Digi-Key, Supplier 2=Newark, Supplier 3=Mouser, Supplier Part Number 2=52K3387, Supplier Part Number 3=571-1-770973-0, Termination=Solder, VDE Tested=Yes, Voltage Rating=600V, Width=12.7mm
J3: "2.0 x 6.5 mm, 5.0 A, Horizontal, Through Hole, Tapered Pins, Dc Power Jack Connector", Color=Black, Current Rating=5A, Flammability Rating="UL94 V-0", Insulation Resistance=50MR, Manufacturer=CUI, Max Operating Temperature=85°C, Min Operating Temperature=-25°C, Package=None, Package Quantity=280, Supplier Part Number 1=CP-102AH-ND, Voltage Rating=24V, Category=Connectors, ComponentLink1Description=http://www.mouser.com/ds/2/670/PJ-102AH-524179.pdf?src-supplier=Mouser, ComponentLink1URL=http://www.mouser.com/ds/2/670/PJ-102AH-524179.pdf?src-supplier=Mouser, ComponentLink2Description=https://www.cui.com/product/resource/digikeypdf/pj-102ah.pdf?src-supplier=Digi-Key, ComponentLink2URL=https://www.cui.com/product/resource/digikeypdf/pj-102ah.pdf?src-supplier=Digi-Key, ComponentLink3Description=http://www.cui.com/Product/Resource/FuturePDF/PJ-102AH.pdf?src-supplier=Future+Electronics, ComponentLink3URL=http://www.cui.com/Product/Resource/FuturePDF/PJ-102AH.pdf?src-supplier=Future+Electronics, Connector Type=Jack, Contact Gender=Male, Contact Material=Copper, Contact Plating=Nickel, CUI_purchase_URL=https://www.cuidevices.com/product/interconnect/connectors/dc-power-connectors/jacks/pj-102ah?utm_source=snapeda.com&utm_medium=referral&utm_campaign=snapedaBOM, Diameter=2.1mm, Digi-Key_Part_Number=CP-102AH-ND, Digi-Key_Purchase_URL=https://www.digikey.com/product-detail/en/cui-devices/PJ-102AH/CP-102AH-ND/408448?utm_source=snapeda&utm_medium=aggregator&utm_campaign=symbol, Gender=Male, Housing Color=Black, Housing Material=Thermoplastic, Lead Free="Lead Free", Manufacturer Part Number=PJ-102AH, MF="CUI Devices", Mount="Through Hole", MP=PJ-102AH, Number of Conductors=2, Orientation=Horizontal, Packaging=Bulk, RoHS=Yes, RoHS Compliant=Yes, Series=-, Shielding=Unshielded, SnapEDA_Link=https://www.snapeda.com/parts/PJ-102AH/CUI%20Devices/view-part/228264/?ref=snap, Supplier 1=Digi-Key, Termination="Through Hole"
MCU1: "Mcu, Arduino Due, 32-BIT Cortex- M3 Arm, 96MHZ, 256K, 50K, 5 Spi", Case/Package=Module, Manufacturer=Arduino, Manufacturer Part Number=A000062, Package Quantity=1, Supplier Part Number 1=1050-1049-ND, Category="Embedded Processors and Controllers", ComponentLink1Description=https://datasheet.ciiva.com/12069/arduinodue-216811-12069710.pdf?src-supplier=Mouser, ComponentLink1URL=https://datasheet.ciiva.com/12069/arduinodue-216811-12069710.pdf?src-supplier=Mouser, ComponentLink2Description=https://datasheet.ciiva.com/14100/due-eng-tds-14100428.pdf?src-supplier=Distrelec, ComponentLink2URL=https://datasheet.ciiva.com/14100/due-eng-tds-14100428.pdf?src-supplier=Distrelec, ComponentLink3Description=https://datasheet.ciiva.com/6205/arduinoduebrd-web-6205279.pdf?src-supplier=Digi-Key, ComponentLink3URL=https://datasheet.ciiva.com/6205/arduinoduebrd-web-6205279.pdf?src-supplier=Digi-Key, ComponentLink4Description=https://datasheet.ciiva.com/19455/2170222-19455450.pdf?src-supplier=Jameco, ComponentLink4URL=https://datasheet.ciiva.com/19455/2170222-19455450.pdf?src-supplier=Jameco, ComponentLink5Description=https://datasheet.ciiva.com/20168/73-4445-20168553.pdf?src-supplier=Rapid+Electronics, ComponentLink5URL=https://datasheet.ciiva.com/20168/73-4445-20168553.pdf?src-supplier=Rapid+Electronics, ComponentLink6Description=https://datasheet.ciiva.com/6810/1682211-6810793.pdf?src-supplier=Newark, ComponentLink6URL=https://datasheet.ciiva.com/6810/1682211-6810793.pdf?src-supplier=Newark, ComponentLink7Description=https://datasheet.ciiva.com/7647/1682211-7647597.pdf?src-supplier=Element14, ComponentLink7URL=https://datasheet.ciiva.com/7647/1682211-7647597.pdf?src-supplier=Element14, Core Architecture=ARM, DeviceSetName=DUE(NORMAL), Evaluation Kit=Yes, GateName_1=G$1, Height=0.05inch, Length=4.5inch, LibraryName=DUElib130425, Number of Bits=32, Package=DUE(NORMAL), Pricing 1="1=40.30000 (USD)", Pricing 2="1=40.30000, 10=40.30000, 50=40.30000, 100=40.30000, 1000=40.30000, 10000=40.30000 (USD)", REACH SVHC=Unknown, RoHS=Yes, Series=AT91SAM3, Stock 1=7059, Stock 2=901, Supplier 1=Digi-Key, Supplier 2=Mouser, Supplier Part Number 2=782-A000062, SymbolName_1=DUE(NORMAL), Weight=0.09lb, Width=2inch
R1 R2 R3 R4 R5 R6 R7 R8 R9 R10 R11 R12 R13 R14 R15 R16 R17 R18 R19 R20 R21 R22 R23 R24: "Res Thick Film 0805 5.1kOhm 1% 2/5W ±100ppm/K Molded Paper T/R", Case/Package=0805, Manufacturer="Vishay Dale", Manufacturer Part Number=RCS08055K10FKEA, Max Operating Temperature=155°C, Max Power Dissipation=400mW, Min Operating Temperature=-55°C, Package Quantity=5000, Resistance=5.1kR, Resistor Type="Thick Film", Supplier Part Number 1=541-RCS08055K10FKEACT-ND, Temperature Coefficient=100ppm/°C, Tolerance=1%, Category="Chip SMD Resistors", ComponentLink1Description=http://www.vishay.com/docs/20065/rcse3.pdf?src-supplier=Digi-Key, ComponentLink1URL=http://www.vishay.com/docs/20065/rcse3.pdf?src-supplier=Digi-Key, Features="Automotive AEC-Q200", Height=0.02inch, Length=0.079inch, Number of Terminations=2, Packaging="Tape and Reel", Pricing 1="1=0.26000, 10=0.21800, 100=0.08510, 1000=0.03560, 2500=0.03264 (USD)", Pricing 2="1=0.26000, 10=0.21800, 100=0.08510, 1000=0.03560, 2500=0.03264 (USD)", Pricing 3="1=0.26000, 10=0.21800, 50=0.21800, 100=0.08600, 1000=0.03600, 10000=0.03400 (USD)", RoHS=Yes, Stock 1=3307, Stock 2=3307, Stock 3=1182, Supplier 1=Digi-Key, Supplier 2=Digi-Key, Supplier 3=Mouser, Supplier Part Number 2=541-RCS08055K10FKEADKR-ND, Supplier Part Number 3=71-RCS08055K10FKEA, Width=0.049inch
U1 U3 U5 U7 U8 U10: "1-Channel Single ADC SAR 250ksps 18-bit Serial Automotive 16-Pin MSOP Tube", Case/Package=MSOP, Manufacturer="Analog Devices / Linear Technology", Manufacturer Part Number=LTC2336HMS-18#PBF, Max Operating Temperature=125°C, Max Supply Voltage=5.25V, Min Operating Temperature=-40°C, Min Supply Voltage=4.75V, Nominal Supply Current=5.5mA, Package Quantity=37, Supplier Part Number 1=505-LTC2336HMS-18#PBF-ND, Category="Analog to Digital Converters (ADCs)", ComponentLink1Description=https://datasheet.ciiva.com/31394/1753492-31394758.pdf?src-supplier=Farnell, ComponentLink1URL=https://datasheet.ciiva.com/31394/1753492-31394758.pdf?src-supplier=Farnell, ComponentLink2Description=https://datasheet.ciiva.com/29654/43771-29654171.pdf?src-supplier=Digi-Key, ComponentLink2URL=https://datasheet.ciiva.com/29654/43771-29654171.pdf?src-supplier=Digi-Key, ComponentLink3Description=https://datasheet.ciiva.com/28464/1753492-28464969.pdf?src-supplier=Element14, ComponentLink3URL=https://datasheet.ciiva.com/28464/1753492-28464969.pdf?src-supplier=Element14, Interface=SPI, Number of A/D Converters=1, Number of Bits=18, Number of Inputs=1, Number of Pins=16, Packaging=Rail/Tube, Pricing 1="1=51.57000, 10=48.11400, 25=46.09720, 100=44.84700 (USD)", REACH SVHC="No SVHC", Resolution=18b, RoHS=Yes, RoHS Compliant=Yes, Sampling Rate=250000S/s, Stock 1=51, Supplier 1=Digi-Key
U2 U6 U9: "Op Amp Quad Low Power Amplifier R-R O/P ±18V/36V 10-Pin MSOP Tube", Case/Package=MSOP, Input Bias Current=0.5pA, Input Capacitance=3.3pF, Input Offset Voltage (Vos)=350uV, Manufacturer="Analog Devices", Max Dual Supply Voltage=18V, Max Frequency=1kHz, Max Operating Temperature=85°C, Max Supply Voltage=36V, Min Dual Supply Voltage=1.5V, Min Operating Temperature=-40°C, Min Supply Voltage=3V, Nominal Supply Current=2.5mA, Operating Supply Current=180uA, Output Current per Channel=8mA, Power Supply Rejection Ratio (PSRR)=90dB, Supplier Part Number 1=505-AD8244BRMZ-ND, Voltage Gain=0dB, -3db Bandwidth=3MHz, Bandwidth=3.6MHz, Category="Amplifiers - Op Amps, Buffer, Instrumentation", Common Mode Rejection Ratio=61.8dB, ComponentLink1Description=https://datasheet.ciiva.com/29970/ad8244-29970485.pdf?src-supplier=Avnet, ComponentLink1URL=https://datasheet.ciiva.com/29970/ad8244-29970485.pdf?src-supplier=Avnet, Gain Bandwidth Product=3MHz, Height=0.95mm, Lead Free="Contains Lead", Length=3.1mm, Manufacturer Part Number=AD8244BRMZ, Mount="Surface Mount", Number of Amplifiers=4, Number of Circuits=4, Number of Pins=10, Packaging=Rail/Tube, Pricing 1="1=7.39000, 10=6.67700, 25=6.36680, 100=5.52830, 250=5.27984, 500=4.83450 (USD)", Pricing 2="1=7.40000, 10=6.68000, 50=6.36000, 100=5.52000, 1000=4.39000, 10000=4.39000 (USD)", Pricing 3="10=5.95000, 20=5.56500 (GBP)", Quiescent Current=180uA, REACH SVHC="No SVHC", RoHS=Yes, Settling Time=18us, Slew Rate=0.8V/µs, Stock 1=3, Stock 2=351, Stock 3=500, Supplier 1=Digi-Key, Supplier 2=Mouser, Supplier 3=RSComponents, Supplier Part Number 2=584-AD8244BRMZ, Supplier Part Number 3=1831998P, Width=3.1mm
U4: library part TI-7660-8, "CMOS Voltage Converter 8-VSSOP -40 to 85", Case/Package=VSSOP, Manufacturer="Texas Instruments", Manufacturer Part Number=TL7660CDGKR, Max Input Voltage=10V, Max Operating Temperature=125°C, Min Operating Temperature=-40°C, Min Supply Voltage=1.5V, Nominal Supply Current=120uA, Output Current=20uA, Output Voltage=20V, Package Quantity=1, Quiescent Current=110uA, Supplier Part Number 1=296-TL7660CDGKRCT-ND, Switching Frequency=9kHz, Category="Voltage Regulators - Switching", ComponentLink1Description=https://datasheet.ciiva.com/15114/getdatasheetpartid-256695-15114098.pdf?src-supplier=Verical, ComponentLink1URL=https://datasheet.ciiva.com/15114/getdatasheetpartid-256695-15114098.pdf?src-supplier=Verical, ComponentLink2Description=https://datasheet.ciiva.com/2025/tl7660-2025569.pdf?src-supplier=Digi-Key, ComponentLink2URL=https://datasheet.ciiva.com/2025/tl7660-2025569.pdf?src-supplier=Digi-Key, ComponentLink3Description=https://datasheet.ciiva.com/2025/tl7660-2025570.pdf?src-supplier=Digi-Key, ComponentLink3URL=https://datasheet.ciiva.com/2025/tl7660-2025570.pdf?src-supplier=Digi-Key, ComponentLink4Description=https://datasheet.ciiva.com/2025/tl7660-2025571.pdf?src-supplier=Digi-Key, ComponentLink4URL=https://datasheet.ciiva.com/2025/tl7660-2025571.pdf?src-supplier=Digi-Key, Contact Plating=Gold, Lead Free="Lead Free", Logic Function=Inverting, Max Supply Voltage=10V, Number of Channels=1, Number of Outputs=1, Number of Pins=8, Output Type=Adjustable, Packaging="Tape and Reel", Pricing 1="1=1.79000, 10=1.61200, 25=1.52120, 100=1.29600, 250=1.21688, 500=1.06476, 1000=1.00450 (USD)", Pricing 2="1=1.79000, 10=1.61200, 25=1.52120, 100=1.29600, 250=1.21688, 500=1.06476, 1000=1.00450 (USD)", Pricing 3="2500=1.00450 (USD)", Pricing 4="1=1.72270, 10=1.54570, 25=1.47060, 100=1.22500, 250=1.13670, 500=0.99630, 1000=0.81540 (USD)", Pricing 5="1=1.79000, 10=1.62000, 25=1.53000, 50=1.53000, 100=1.30000, 250=1.22000, 500=1.07000, 1000=0.88300, 10000=0.88300 (USD)", Radiation Hardening=No, RoHS=Yes, RoHS Compliant=Yes, Series=-, Stock 1=3670, Stock 2=3670, Stock 3=2500, Stock 4=2412, Stock 5=1398, Supplier 1=Digi-Key, Supplier 2=Digi-Key, Supplier 3=Digi-Key, Supplier 4="Arrow Electronics", Supplier 5=Mouser, Supplier Part Number 2=296-TL7660CDGKRDKR-ND, Supplier Part Number 3=296-TL7660CDGKRTR-ND, Supplier Part Number 4=TL7660CDGKR, Supplier Part Number 5=595-TL7660CDGKR, Supply Current=120uA, Synchronous Rectifier=No, Weight=0.000935oz, Width=3mm
U11: library part LTC6655, "V-Ref Precision 1.25V 5mA Automotive 8-Pin MSOP (test to see if this pushes to cloud)", Case/Package=MSOP, Manufacturer="Analog Devices / Linear Technology", Max Operating Temperature=125°C, Max Output Voltage=1.25V, Min Operating Temperature=-40°C, Nominal Supply Current=5mA, Package Quantity=50, Quiescent Current=7mA, Supplier Part Number 1=584-C6655CHMS81.25PF, Temperature Coefficient=5ppm/°C, Tolerance=0.05%, Category="Voltage Regulators - Linear", ComponentLink1Description=https://datasheet.ciiva.com/2006/28576-2006051.pdf?src-supplier=Digi-Key, ComponentLink1URL=https://datasheet.ciiva.com/2006/28576-2006051.pdf?src-supplier=Digi-Key, ComponentLink2Description=https://datasheet.ciiva.com/14152/ltc6655-eng-ds-14152023.pdf?src-supplier=Distrelec, ComponentLink2URL=https://datasheet.ciiva.com/14152/ltc6655-eng-ds-14152023.pdf?src-supplier=Distrelec, Manufacturer Part Number=LTC6655CHMS8-1.25#PBF, Mount="Surface Mount", Number of Channels=1, Number of Pins=8, Output Current=5mA, Output Voltage=1.25V, Packaging=Rail/Tube, Pricing 1="1=9.85000, 10=8.73000, 50=8.32000, 100=7.22000, 250=6.90000, 1000=6.90000, 10000=6.90000 (USD)", Reference Type=Series, RoHS=Yes, RoHS Compliant=Yes, Series=-, Stock 1=586, Supplier 1=Mouser, Supply Current=5mA

## Via types
v1: diameter 50, hole 28, Top Layer to Bottom Layer, 5 vias

## Nets (pads, with @x,y where several pads share a name; then routed paths per layer and width w, separated by ;. In a path a pad name is that pad's centre, name@x,y a point inside that pad or via, vN(x,y) a via of type N, cw(c..) or ccw(c..) an arc to the next point about the centre after c; other vN are vias at no path point)
+1.25V: C8.2 C18.2 C24.1 C30.2 C39.2 C48.2 C57.2 U1.8 U3.8 U5.8 U7.8 U8.8 U10.8 U11.6 U11.7
+3V3: MCU1.3V3 U1.10 U1.15 U3.10 U3.15 U5.10 U5.15 U7.10 U7.15 U8.10 U8.15 U10.10 U10.15
+5V: C23.2 MCU1.5V U1.2 U2.3 U3.2 U4.8 U5.2 U6.3 U7.2 U8.2 U9.3 U10.2 U11.1 U11.2
+24V: C59.1 J1.1 J3.1
-5V: C19.- U2.8 U4.5 U6.8 U9.8
GND: C4.2 C5.1 C7.2 C8.1 C10.2 C13.2 C14.1 C17.2 C18.1 C19.+ C21.2 C23.1 C24.2 C26.2 C27.1 C29.2 C30.1 C32.2 C35.2 C36.1 C38.2 C39.1 C41.2 C44.2 C45.1 C47.2 C48.1 C50.2 C53.2 C54.1 C56.2 C57.1 C58.2 C59.2 J1.2 J3.2 J3.3 MCU1.GND_1 MCU1.GND_2 U1.3 U1.6 U1.12 U1.16 U3.3 U3.6 U3.16 U4.3 U4.6 U5.3 U5.6 U5.16 U7.3 U7.6 U7.16 U8.3 U8.6 U8.16 U10.3 U10.6 U10.16 U11.3 U11.4 U11.5 U11.8
NetC1_1: C1.1 C2.1 U1.4 U2.2 | length 325
  Top Layer w10: C2.1@1475,5299.61 C1.1
NetC1_2: C1.2 C2.2 R1.2 R2.1 | length 1037.2
  Top Layer w10: C2.2 C1.2@1713.39,5500.39 ; C1.2@1781.99,5500.39 C1.2@1713.39,5500.39 ; R1.2 R2.1 1776.09,6043.31 1662.66,5929.88 1662.66,5551.12 C1.2@1713.39,5500.39
NetC3_1: C3.1 C6.1 U1.5 U2.4 | length 250
  Bottom Layer w10: C6.1 C3.1
NetC3_2: C3.2 C6.2 R3.2 R4.1 | length 1093.7
  Bottom Layer w10: C6.2 C3.2 2068.19,5500.39 2075,5507.2 2075,5975 2006.69,6043.31 R4.1 1945,6044.31 R3.2
NetC4_1: C4.1 R2.2 U2.1 | length 193.8
  Top Layer w10: R2.2@1755.5,5936.1 1776.09,5956.69 R2.2 1781.99,5806.3 C4.1
NetC5_2: C5.2 U1.1
NetC7_1: C7.1 U1.7
NetC9_1: C9.1 C11.1 R5.2 R6.1 | length 1065.4
  Top Layer w10: R5.2 R6.1 2527.07,6031.3 2419.55,5923.78 2419.55,5568.44 2450,5537.99 2450,5495.2 2456.81,5488.39 C11.1 C9.1
NetC9_2: C9.2 C11.2 U2.7 U3.5 | length 243
  Top Layer w10: C11.2 C9.2
NetC10_1: C10.1 R4.2 U2.5 | length 160
  Bottom Layer w10: C10.1 1944,5798.09 R4.2
NetC12_1: C12.1 C15.1 R7.2 R8.1 | length 1050.1